# Altium PCB TP03PCB.PcbDoc
Units mm, origin at the board's own origin, x right, y up, seen from the top; angles counter-clockwise.
Board outline 41 x 58.5 mm, 2 copper layers (Top Layer, Bottom Layer); 36 components, 22 nets, 144 pads, 0 vias.
Unrouted connection lines stored in the file: 69.
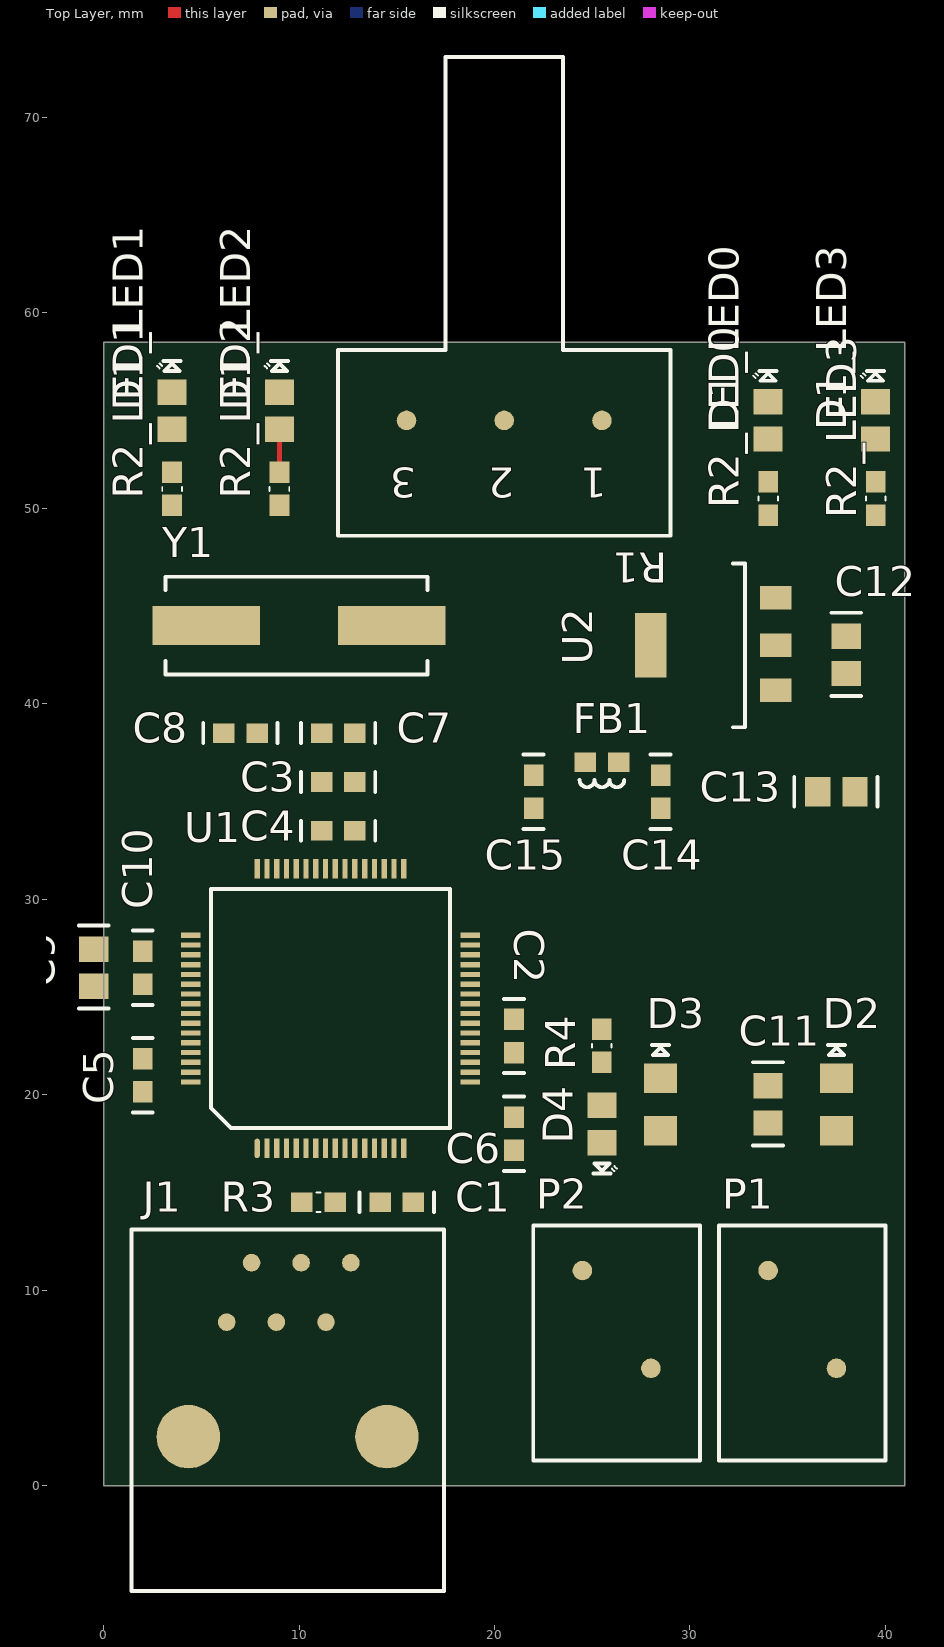
[diagram p0: Top Layer view]
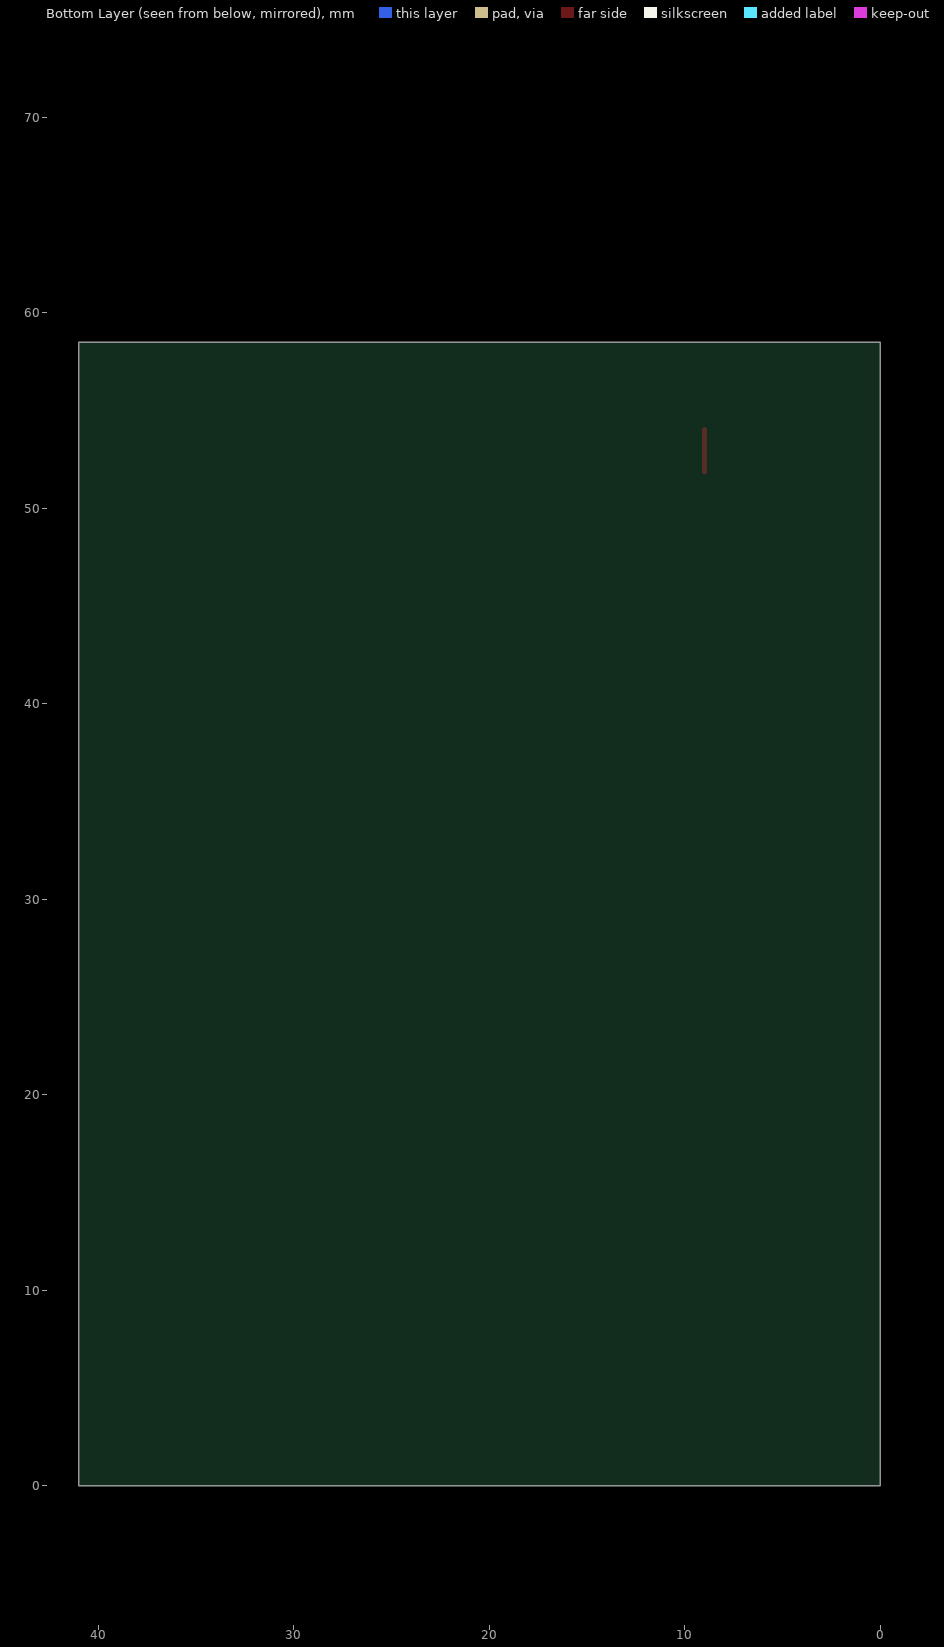
[diagram p1: Bottom Layer view, seen from below]

## Layer stack, top to bottom
Top Solder: solder mask 0.0102, Solder Resist, Dk 3.5
Top Layer: signal copper 0.0356
Dielectric 1: dielectric 0.32, FR-4, Dk 4.8
Bottom Layer: signal copper 0.0356
Bottom Solder: solder mask 0.0102, Solder Resist, Dk 3.5

## Board outline
0,0 41,0 41,58.5 0,58.5

## Design rules (kind name [scope] priority, off if disabled: settings)
Clearance [All] p1: gap=0.2
HoleSize [All] p1: absolutevalues=TRUE maxlimit=2.54 minlimit=0.3 maxpercent=80.000 minpercent=20.000
PolygonConnect [All] p1: connectstyle=Relief reliefconductorwidth=0.254 reliefentries=4 polygonreliefangle="90 Angle" airgapwidth=0.254
RoutingVias [All] p1: holewidth=0.711 width=1.27 viastyle="Through Hole" minholewidth=0.3 minwidth=0.7 maxholewidth=0.711 maxwidth=1.27
SolderMaskExpansion [All] p1: expansion=0.102
UnpouredPolygon [All] p1: allowunpoured=FALSE
Width [All] p1: maxlimit=3 minlimit=0.2 preferedwidth=0.254
28 further rules are at their usual default settings.

## Classes and differential pairs
channel class led: LED0 LED1 LED2 LED3
component class TP2: R1
component class POWER: C11 C12 C13 C14 C15 D2 D3 D4 FB1 P1 P2 R4 U2
component class PIC: C1 C2 C3 C4 C5 C6 C7 C8 C9 C10 J1 R3 U1 Y1
component class LED3: D1_LED3 R2_LED3
component class LED2: D1_LED2 R2_LED2
component class LED1: D1_LED1 R2_LED1
component class LED0: D1_LED0 R2_LED0

## Components (designator, comment, footprint, x,y, rotation, side; value= is the part's Value field where it differs from the comment)
C1 "100nF" CAPC1608N 15,14.5 r180 top
C2 "100nF" CAPC1608N 21,23 r90 top
C3 "100nF" CAPC1608N 12,36 r180 top
C4 "100nF" CAPC1608N 12,33.5 r180 top
C5 "100nF" CAPC1608N 2,21 r270 top
C6 "100nF" CAPC1608N 21,18 r90 top
C7 "20pF" CAPC1608N 12,38.5 r180 top
C8 "20pF" CAPC1608N 7,38.5 r0 top
C9 "10uF" CAPC2012N -0.5,26.5 r90 top
C10 "1uF" CAPC1608N 2,26.5 r270 top
C11 "10uF" CAPC2012N 34,19.5 r90 top
C12 "10uF" CAPC2012N 38,42.5 r90 top
C13 "10uF" CAPC2012N 37.5,35.5 r180 top
C14 "1uF" CAPC1608N 28.5,35.5 r90 top
C15 "100nF" CAPC1608N 22,35.5 r90 top
D1_LED0 "Green LED" "LED 0805" 34,54.5 r90 top (schematic designator D1)
D1_LED1 "Green LED" "LED 0805" 3.5,55 r90 top (schematic designator D1)
D1_LED2 "Green LED" "LED 0805" 9,55 r90 top (schematic designator D1)
D1_LED3 "Green LED" "LED 0805" 39.5,54.5 r90 top (schematic designator D1)
D2 "GF1A" SMA/DO-214AC_21 37.5,19.5 r90 top
D3 "GF1A" SMA/DO-214AC_21 28.5,19.5 r90 top
D4 "Green LED" "LED 0805" 25.5,18.5 r270 top
FB1 "600r" INDC1608AN 25.5,37 r180 top
J1 "Program / Debug" RJ12_90 14.5,2.5 r270 top
P1 "12V Main" PHOENIX_1985195 34,6 r0 top
P2 "12V Battery" PHOENIX_1985195 24.5,6 r0 top
R1 "1K" PDB181-K415K-102A2 25.5,54.5 r180 top
R2_LED0 "330r" RESC1608N 34,50.5 r270 top (schematic designator R2)
R2_LED1 "330r" RESC1608N 3.5,51 r270 top (schematic designator R2)
R2_LED2 "330r" RESC1608N 9,51 r270 top (schematic designator R2)
R2_LED3 "330r" RESC1608N 39.5,50.5 r270 top (schematic designator R2)
R3 "4.7k" RESC1608N 11,14.5 r0 top
R4 "470r" RESC1608N 25.5,22.5 r90 top
U1 "PIC32MX764F128H-I/PT" QFP50P1200X1200X120-64 11.5,25 r0 top
U2 "AP1117" TD03B_N 28,43 r90 top
Y1 "8MHz" "HC49/4H SMX CRYSTAL" 10,44 r0 top

## Footprints (in the part's own frame and the unit in brackets; to place one, negate y for a bottom-side part, rotate by r counter-clockwise, add the part's x,y. Pads: shape width x height; smd on the part's side, far side on the other; paste and mask are expansions set on the pad)
CAPC1608N [mm]
  rect 1.1x1 smd: 1(-0.85,0) 2(0.85,0)
  silkscreen extent -1.9,-0.51 1.91,0.51
CAPC2012N [mm]
  rect 1.3x1.5 smd: 1(-0.95,0) 2(0.95,0)
  silkscreen extent -2.1,-0.76 2.16,0.76
"HC49/4H SMX CRYSTAL" [mm]
  rect 5.5x2 smd: 1(-4.75,0) 2(4.75,0)
  silkscreen extent -6.83,-2.5 6.57,2.5
INDC1608AN [mm]
  rect 1.1x1 smd: 1(-0.85,0) 2(0.85,0)
  silkscreen extent -1.14,0.89 1.14,1.27
"LED 0805" [mm]
  rect 1.3x1.5 smd: 1(-0.95,0) 2(0.95,0)
  silkscreen extent 2.03,-0.43 2.54,0.76
PDB181-K415K-102A2 [mm]
  round 1 smd: 1(0,0) 2(5,0) 3(10,0)
  silkscreen extent -3.5,-18.6 13.5,5.9
PHOENIX_1985195 [mm]
  round 1 smd: 1(3.5,0) 2(0,5)
  silkscreen extent -2.51,-4.72 6.01,7.3
QFP50P1200X1200X120-64 [mm]
  oval 0.27x1 smd: 1(-3.643,-7.747)
  rect 0.27x1 smd: 2(-3.143,-7.747) 3(-2.643,-7.747) 4(-2.143,-7.747) 5(-1.643,-7.747) 6(-1.143,-7.747) 7(-0.643,-7.747) 8(-0.143,-7.747) 9(0.357,-7.747) 10(0.857,-7.747) 11(1.357,-7.747) 12(1.857,-7.747) 13(2.357,-7.747) 14(2.857,-7.747) 15(3.357,-7.747) 16(3.857,-7.747) 33(3.857,6.553) 34(3.357,6.553) 35(2.857,6.553) 36(2.357,6.553) 37(1.857,6.553) 38(1.357,6.553) 39(0.857,6.553) 40(0.357,6.553) 41(-0.143,6.553) 42(-0.643,6.553) 43(-1.143,6.553) 44(-1.643,6.553) 45(-2.143,6.553) 46(-2.643,6.553) 47(-3.143,6.553) 48(-3.643,6.553)
  rect 1x0.27 smd: 17(7.257,-4.347) 18(7.257,-3.847) 19(7.257,-3.347) 20(7.257,-2.847) 21(7.257,-2.347) 22(7.257,-1.847) 23(7.257,-1.347) 24(7.257,-0.847) 25(7.257,-0.347) 26(7.257,0.153) 27(7.257,0.653) 28(7.257,1.153) 29(7.257,1.653) 30(7.257,2.153) 31(7.257,2.653) 32(7.257,3.153) 49(-7.043,3.153) 50(-7.043,2.653) 51(-7.043,2.153) 52(-7.043,1.653) 53(-7.043,1.153) 54(-7.043,0.653) 55(-7.043,0.153) 56(-7.043,-0.347) 57(-7.043,-0.847) 58(-7.043,-1.347) 59(-7.043,-1.847) 60(-7.043,-2.347) 61(-7.043,-2.847) 62(-7.043,-3.347) 63(-7.043,-3.847) 64(-7.043,-4.347)
  silkscreen extent -6.01,-6.71 6.22,5.52
RESC1608N [mm]
  rect 1.1x1 smd: 1(-0.85,0) 2(0.85,0)
  silkscreen extent -0.1,-0.5 0.1,0.5
RJ12_90 [mm]
  round 0.9 smd: 1(-5.86,-8.2) 2(-8.9,-6.93) 3(-5.86,-5.66) 4(-8.9,-4.39) 5(-5.86,-3.12) 6(-8.9,-1.85)
  round 3.25 smd: ""(0,0) ""(0,-10.16)
  silkscreen extent -10.6,-13.08 7.9,2.92
SMA/DO-214AC_21 [mm]
  rect 1.52x1.68 smd: 1(-1.345,0) 2(1.345,0)
  silkscreen extent 2.54,-0.43 3.05,0.43
TD03B_N [mm]
  round 1 on Top Overlay: 1(-4.586,-6.4)
  rect 1.2x1.6 smd: 1(-2.3,-6.4) 3(2.427,-6.4) 4(0,-6.4)
  rect 3.3x1.6 smd: ""(0,0)
  silkscreen extent -4.2,-4.83 4.18,-4.19

## Part data
C1 C2 C3 C4 C5 C6 C7 C8 C9 C10 C11 C12 C13 C14 C15: library part Cap, "Capacitor"
D1_LED0 D1_LED1 D1_LED2 D1_LED3 D4: library part LED2, "Typical INFRARED GaAs LED"
D2 D3: library part Diode, "Default Diode"
FB1: library part Inductor, "Inductor"
J1: "RJ11"
P1 P2: library part "Header 2", "Header, 2-Pin"
R1: library part RPot, "Potentiometer"
R2_LED0 R2_LED1 R2_LED2 R2_LED3 R3 R4: library part Res1, "Resistor"
U1: library part PIC, "PIC32MX764F128H"
U2: "1A LDO, 18V input, DPAK"
Y1: library part XTAL, "Crystal Oscillator"

## Nets (pads, with @x,y where several pads share a name; then routed paths per layer and width w, separated by ;. In a path a pad name is that pad's centre, name@x,y a point inside that pad or via, vN(x,y) a via of type N, cw(c..) or ccw(c..) an arc to the next point about the centre after c; other vN are vias at no path point)
1: C6.2 C15.2 FB1.2 R1.2 U1.19
2: R1.3 U1.14
3: C1.1 C2.1 C3.1 C4.1 C5.1 C6.1 C7.1 C8.2 C9.1 C10.2 C11.1 C12.1 C13.1 C14.1 C15.1 D1_LED0.2 D1_LED1.2 D1_LED2.2 D1_LED3.2 D4.2 J1.3 P1.2 P2.2 R1.1 U1.9 U1.20 U1.25 U1.41 U2.1@34.4,40.7
ALIM: D2.1 P1.1
BATTERY: D3.1 P2.1
LED0: R2_LED0.2
LED1: R2_LED1.2
LED2: R2_LED2.2
LED3: R2_LED3.2
MCLR: J1.1 R3.1 U1.7
NetC9_2: C9.2 C10.1 U1.56
NetD1_LED0_1: D1_LED0.1 R2_LED0.1
NetD1_LED1_1: D1_LED1.1 R2_LED1.1
NetD1_LED2_1: D1_LED2.1 R2_LED2.1 | length 2.2
  Top Layer w0.254: R2_LED2.1 D1_LED2.1
NetD1_LED3_1: D1_LED3.1 R2_LED3.1
NetD4_1: D4.1 R4.1
PGC: J1.5 U1.15
PGD: J1.4 U1.16
V3P3: C1.2 C2.2 C3.2 C4.2 C5.2 C13.2 C14.2 FB1.1 J1.2 R3.2 U1.10 U1.26 U1.35 U1.38 U1.57 U2.4
V5: C11.2 C12.2 D2.2 D3.2 R4.2 U2.3
X1: C7.2 U1.39 Y1.2
X2: C8.1 U1.40 Y1.1
pads on no net: J1. J1.6 U1.1 U1.2 U1.3 U1.4 U1.5 U1.6 U1.8 U1.11 U1.12 U1.13 U1.17 U1.18 U1.21 U1.22 U1.23 U1.24 U1.27 U1.28 U1.29 U1.30 U1.31 U1.32 U1.33 U1.34 U1.36 U1.37 U1.42 U1.43 U1.44 U1.45 U1.46 U1.47 U1.48 U1.49 U1.50 U1.51 U1.52 U1.53 U1.54 U1.55 U1.58 U1.59 U1.60 U1.61 U1.62 U1.63 U1.64 U2. U2.1@34.4,38.414

## Text inside footprints (layer, text, board x,y; h text height)
R1: Top Overlay "3" at 16.008,52.077 h1.52 r180; Top Overlay "2" at 21.008,52.077 h1.52 r180; Top Overlay "1" at 25.754,52.077 h1.52 r180